# Altium PCB final_PCB.PcbDoc
Units mm, origin at the board's own origin, x right, y up, seen from the top; angles counter-clockwise.
Board outline 61.21 x 83.69 mm, 2 copper layers (Top Layer, Bottom Layer); 32 components, 26 nets, 116 pads, 31 vias.
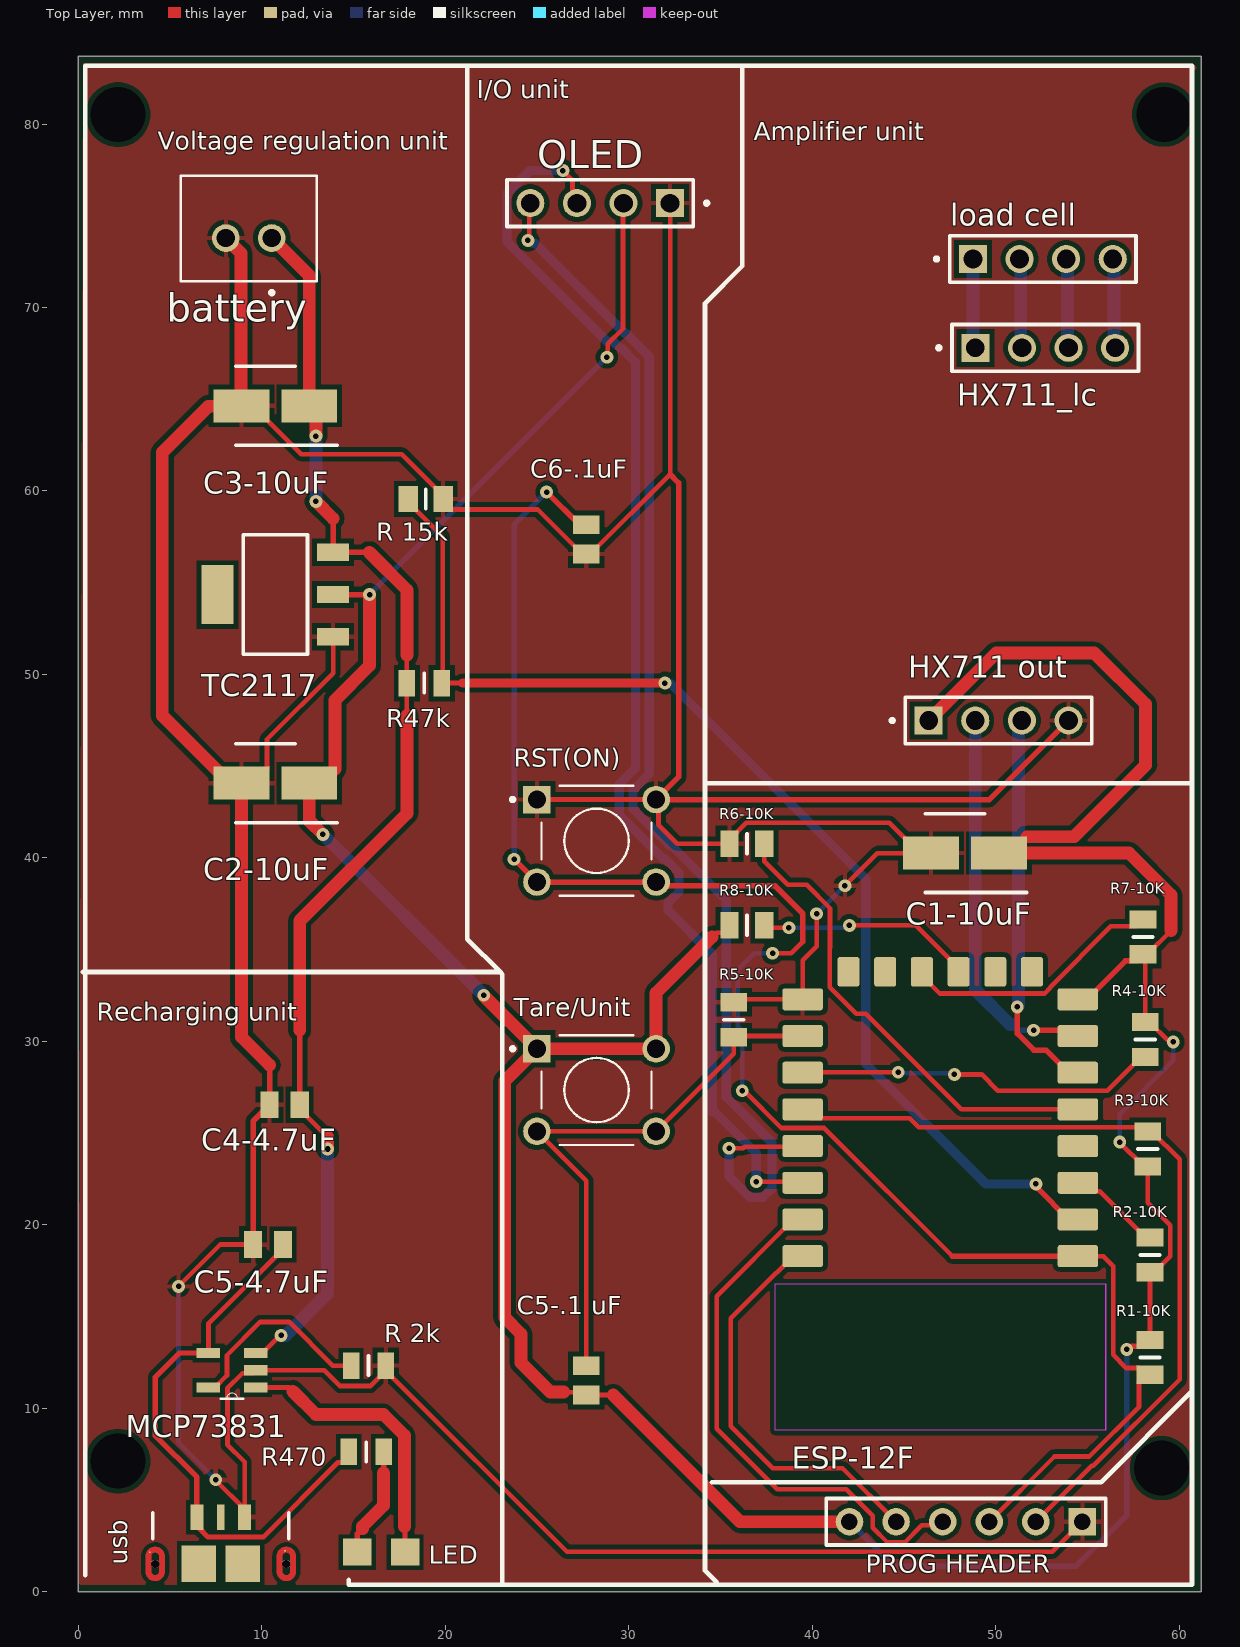
[diagram p0: Top Layer view]
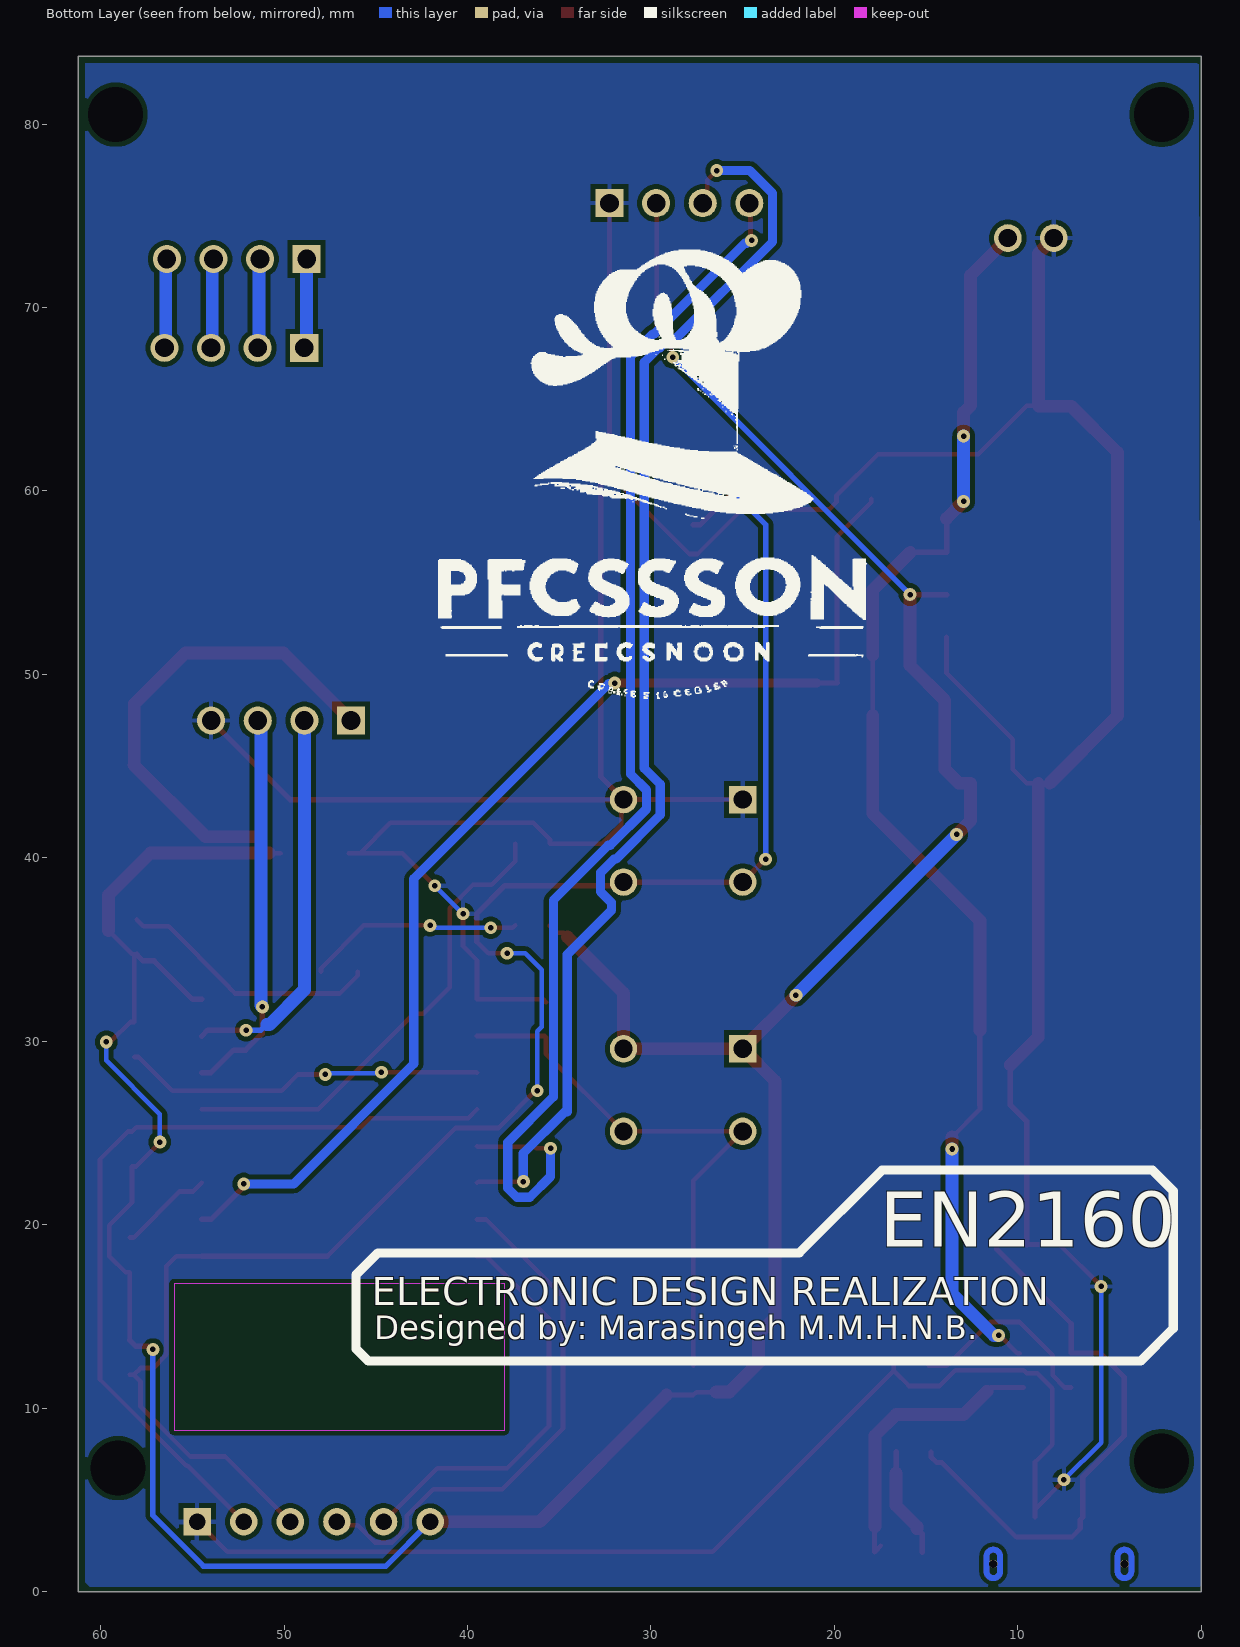
[diagram p1: Bottom Layer view, seen from below]
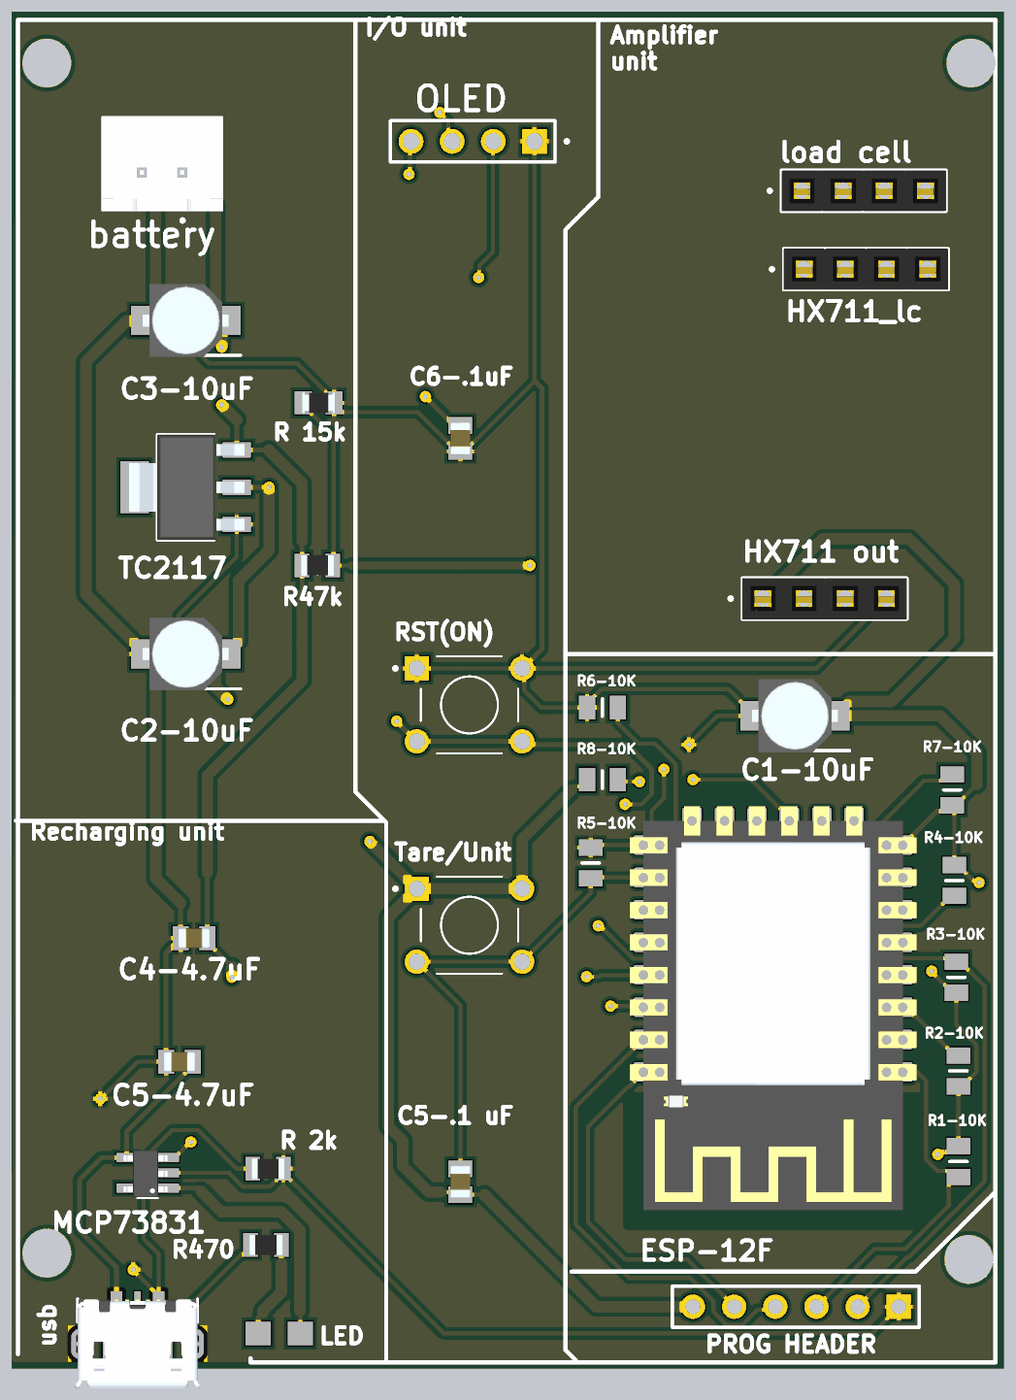
[diagram p2: 3D render of the assembled board from above, using the file's embedded part models]

## Layer stack, top to bottom
Top Solder: solder mask 0.0102, Solder Resist, Dk 3.5
Top Layer: signal copper 0.0356
Dielectric 1: dielectric 0.32, FR-4, Dk 4.8
Bottom Layer: signal copper 0.0356
Bottom Solder: solder mask 0.0102, Solder Resist, Dk 3.5

## Board outline
0,0 61.214,0 61.214,83.693 0,83.693

## Design rules (kind name [scope] priority, off if disabled: settings)
Clearance [All] p1: gap=0.254 ignorepadtopadclearanceinfootprint=TRUE except(0: Arc-Hole Track-Hole SMDPad-Hole THPad-Hole Via-Hole Fill-Hole Poly-Hole Region-Hole Text-Hole)
HoleSize [All] p1: absolutevalues=TRUE maxlimit=3 minlimit=0.025 maxpercent=80.000 minpercent=20.000
MinimumSolderMaskSliver [All] p1: minsoldermaskwidth=0.1
PolygonConnect [All] p1: connectstyle=Relief reliefconductorwidth=0.254 reliefentries=4 polygonreliefangle="90 Angle" airgapwidth=0.254
RoutingVias [All] p1: holewidth=0.3 width=0.7 viastyle="Through Hole" minholewidth=0.3 minwidth=0.7 maxholewidth=0.3 maxwidth=0.7
SMDNeckDown [All] p1: percent=50.000
SolderMaskExpansion [All] p1: expansion=0.102 istentingtop=FALSE
Width [All] p1: maxlimit=0.7 minlimit=0.254 preferedwidth=0.3
28 further rules are at their usual default settings.

## Components (designator, comment, footprint, x,y, rotation, side; value= is the part's Value field where it differs from the comment)
battery "B2B-XH-A(LF)(SN)" JST_B2B-XH-A(LF)(SN) 9.291,73.787 r0 top
C1-10uF "865080340001" CAPAE430X550N 48.332,40.259 r180 top
C2-10uF "865080340001" CAPAE430X550N 10.737,44.069 r180 top
C3-10uF "865080340001" CAPAE430X550N 10.737,64.643 r180 top
C4-4.7uF "885012107013" CAPC2012X145N 11.245,26.543 r0 top
C5-4.7uF "885012107013" CAPC2012X145N 10.345,18.923 r180 top
"C5-.1 uF" "C0805C104K5RAC7411" CAPC2012X88N 27.686,11.519 r90 top
C6-.1uF "C0805C104K5RAC7411" CAPC2012X88N 27.686,57.366 r90 top
ESP-12F "ESP-12F" ESP-12F 46.983,22.788 r180 top
"HX711 out" "MTSW-104-XX-X-S-XXX" SAMTEC_MTSW-104-XX-X-S-XXX 50.164,47.487 r0 top
HX711_lc "MTSW-104-XX-X-S-XXX" SAMTEC_MTSW-104-XX-X-S-XXX 52.709,67.804 r0 top
LED "CLM3C-AKW-CUAVB253" LEDM3020X140N 16.51,2.159 r180 top
"load cell" "MTSW-104-XX-X-S-XXX" SAMTEC_MTSW-104-XX-X-S-XXX 52.578,72.644 r0 top
MCP73831 "MCP73831T-2ACI/OT" SOT95P280X145-5N 8.382,12.065 r180 top
OLED "MTSW-104-XX-X-S-XXX" SAMTEC_MTSW-104-XX-X-S-XXX 28.448,75.692 r180 top
"PROG HEADER" "Header 6" HDR1X6 54.737,3.81 r180 top
R1-10K "CRGCQ0805J10K" RESC2013X65N 58.42,12.766 r270 top
R2-10K "CRGCQ0805J10K" RESC2013X65N 58.42,18.354 r90 top
R3-10K "CRGCQ0805J10K" RESC2013X65N 58.293,24.13 r270 top
R4-10K "CRGCQ0805J10K" RESC2013X65N 58.166,30.099 r270 top
R5-10K "CRGCQ0805J10K" RESC2013X65N 35.724,31.181 r90 top
R6-10K "CRGCQ0805J10K" RESC2013X65N 36.449,40.767 r180 top
R7-10K "CRGCQ0805J10K" RESC2013X65N 58.039,35.687 r270 top
R8-10K "CRGCQ0805J10K" RESC2013X65N 36.449,36.322 r180 top
R47k "CR0805-JW-473ELF" RESC2012X60N 18.862,49.53 r180 top
R470 "CRCW0805470RFKEAC" RESC2012X60N 15.687,7.62 r0 top
"R 2k" "CR0805-JW-202ELF" RESC2012X60N 15.814,12.319 r180 top
"R 15k" "ERJ-6GEYJ153V" RESC2012X70N 18.937,59.563 r180 top
RST(ON) "1825910-2" TE_1825910-2 24.996,43.18 r0 top
Tare/Unit "1825910-2" TE_1825910-2 24.996,29.591 r0 top
TC2117 "TC2117-3.3VDBTR" SOT230P700X180-4N 10.737,54.356 r180 top
usb "USB3090-XX-X_REVE" GCT_USB3090-XX-X_REVE 7.762,1.514 r0 top

## Footprints (in the part's own frame and the unit in brackets; to place one, negate y for a bottom-side part, rotate by r counter-clockwise, add the part's x,y. Pads: shape width x height; smd on the part's side, far side on the other; paste and mask are expansions set on the pad)
CAPAE430X550N [mm]
  rect 3.05x1.8 smd: 1(-1.85,0) 2(1.85,0)
  silkscreen extent -3.38,-2.15 2.15,2.15, body extent -10,-3.38 10,3.38, height 5.8
CAPC2012X88N [mm]
  rect 1.02x1.47 smd: 1(-0.8,0) 2(0.8,0)
  body extent -10,-3.38 10,3.38, height 5.8
CAPC2012X145N [mm]
  rect 0.99x1.47 smd: 1(-0.82,0) 2(0.82,0)
  body extent -10,-3.38 10,3.38, height 5.8
ESP-12F [mm]
  rrect20% 2.2x1.2 smd: 1(-7.5,4.5) 2(-7.5,2.5) 3(-7.5,0.5) 4(-7.5,-1.5) 5(-7.5,-3.5) 6(-7.5,-5.5) 7(-7.5,-7.5) 8(-7.5,-9.5) 9(7.5,-9.5) 10(7.5,-7.5) 11(7.5,-5.5) 12(7.5,-3.5) 13(7.5,-1.5) 14(7.5,0.5) 15(7.5,2.5) 16(7.5,4.5)
  rrect20% 1.2x1.6 smd: 17(-5,-11) 18(-3,-11) 19(-1,-11) 20(1,-11) 21(3,-11) 22(5,-11)
  Keep-Out Layer region: 9,6.011 -9.016,6.011 -9.016,14 9,14
  Keep-Out Layer region: 9,6.005 -9.007,6.005 -9.007,14 9,14
  body extent -8.85,-11.88 8.85,13.02, height 3.1
GCT_USB3090-XX-X_REVE [mm]
  rect 0.7x1.4 smd paste+0 mask+0.254: 1(-1.3,2.55) 5(1.3,2.55)
  rect 0.4x1.4 smd: 3(0,2.55)
  rect 0.1x0.1 smd paste-1 mask+0: 6(-3.87,0.63) 7(3.51,0.72)
  rect 1.9x2 smd: 8(-1.2,0) 9(1.2,0)
  round 0.45 hole 0.45 unplated: ""(-3.575,0) ""(3.575,0)
  Top Layer region: -3.548,0.924 -3.52,0.922 -3.493,0.919 -3.466,0.914 -3.439,0.907 -3.413,0.899 -3.387,0.89 -3.361,0.88 -3.337,0.868 -3.313,0.855 -3.289,0.84 -3.266,0.825 -3.245,0.808 -3.224,0.79 -3.204,0.771 -3.185,0.751 -3.167,0.73 -3.15,0.709 -3.135,0.686 -3.12,0.662 -3.107,0.638 -3.095,0.614 -3.085,0.588 -3.076,0.562 -3.068,0.536 -3.061,0.509 -3.056,0.482 -3.053,0.455 -3.051,0.427 -3.05,0.4 -3.05,0 -3.35,0 -3.35,0.4 -3.35,0.412 -3.351,0.424 -3.353,0.435 -3.355,0.447 -3.358,0.458 -3.361,0.47 -3.365,0.481 -3.369,0.492 -3.375,0.502 -3.38,0.512 -3.386,0.523 -3.393,0.532 -3.4,0.542 -3.408,0.551 -3.416,0.559 -3.424,0.567 -3.433,0.575 -3.443,0.582 -3.452,0.589 -3.463,0.595 -3.473,0.6 -3.483,0.606 -3.494,0.61 -3.505,0.614 -3.517,0.617 -3.528,0.62 -3.54,0.622 -3.551,0.624 -3.563,0.625 -3.587,0.625 -3.599,0.624 -3.61,0.622 -3.622,0.62 -3.633,0.617 -3.645,0.614 -3.656,0.61 -3.667,0.606 -3.677,0.6 -3.688,0.595 -3.698,0.589 -3.707,0.582 -3.717,0.575 -3.726,0.567 -3.734,0.559 -3.742,0.551 -3.75,0.542 -3.757,0.532 -3.764,0.523 -3.77,0.513 -3.775,0.502 -3.781,0.492 -3.785,0.481 -3.789,0.47 -3.792,0.458 -3.795,0.447 -3.797,0.435 -3.799,0.424 -3.8,0.412 -3.8,0.4 -3.8,0 -4.1,0 -4.1,0.4 -4.099,0.427 -4.097,0.455 -4.094,0.482 -4.089,0.509 -4.082,0.536 -4.074,0.562 -4.065,0.588 -4.055,0.614 -4.043,0.638 -4.03,0.663 -4.015,0.686 -4,0.709 -3.983,0.73 -3.965,0.751 -3.946,0.771 -3.926,0.79 -3.905,0.808 -3.884,0.825 -3.861,0.84 -3.837,0.855 -3.813,0.868 -3.789,0.88 -3.763,0.89 -3.737,0.899 -3.711,0.907 -3.684,0.914 -3.657,0.919 -3.63,0.922 -3.602,0.924 -3.575,0.925
  Top Layer region: -3.05,-0.4 -3.051,-0.427 -3.053,-0.455 -3.056,-0.482 -3.061,-0.509 -3.068,-0.536 -3.076,-0.562 -3.085,-0.588 -3.095,-0.614 -3.107,-0.638 -3.12,-0.662 -3.135,-0.686 -3.15,-0.709 -3.167,-0.73 -3.185,-0.751 -3.204,-0.771 -3.224,-0.79 -3.245,-0.808 -3.266,-0.825 -3.289,-0.84 -3.313,-0.855 -3.337,-0.868 -3.361,-0.88 -3.387,-0.89 -3.413,-0.899 -3.439,-0.907 -3.466,-0.914 -3.493,-0.919 -3.52,-0.922 -3.548,-0.924 -3.575,-0.925 -3.602,-0.924 -3.63,-0.922 -3.657,-0.919 -3.684,-0.914 -3.711,-0.907 -3.737,-0.899 -3.763,-0.89 -3.789,-0.88 -3.813,-0.868 -3.837,-0.855 -3.861,-0.84 -3.884,-0.825 -3.905,-0.808 -3.926,-0.79 -3.946,-0.771 -3.965,-0.751 -3.983,-0.73 -4,-0.709 -4.015,-0.686 -4.03,-0.663 -4.043,-0.638 -4.055,-0.614 -4.065,-0.588 -4.074,-0.562 -4.082,-0.536 -4.089,-0.509 -4.094,-0.482 -4.097,-0.455 -4.099,-0.427 -4.1,-0.4 -4.1,0 -3.8,0 -3.8,-0.4 -3.8,-0.412 -3.799,-0.424 -3.797,-0.435 -3.795,-0.447 -3.792,-0.458 -3.789,-0.47 -3.785,-0.481 -3.781,-0.492 -3.775,-0.502 -3.77,-0.513 -3.764,-0.523 -3.757,-0.532 -3.75,-0.542 -3.742,-0.551 -3.734,-0.559 -3.726,-0.567 -3.717,-0.575 -3.707,-0.582 -3.698,-0.589 -3.688,-0.595 -3.677,-0.6 -3.667,-0.606 -3.656,-0.61 -3.645,-0.614 -3.633,-0.617 -3.622,-0.62 -3.61,-0.622 -3.599,-0.624 -3.587,-0.625 -3.563,-0.625 -3.551,-0.624 -3.54,-0.622 -3.528,-0.62 -3.517,-0.617 -3.505,-0.614 -3.494,-0.61 -3.483,-0.606 -3.473,-0.6 -3.463,-0.595 -3.452,-0.589 -3.443,-0.582 -3.433,-0.575 -3.424,-0.567 -3.416,-0.559 -3.408,-0.551 -3.4,-0.542 -3.393,-0.532 -3.386,-0.523 -3.38,-0.512 -3.375,-0.502 -3.369,-0.492 -3.365,-0.481 -3.361,-0.47 -3.358,-0.458 -3.355,-0.447 -3.353,-0.435 -3.351,-0.424 -3.35,-0.412 -3.35,-0.4 -3.35,0 -3.05,0
  Top Layer region: 3.602,0.924 3.63,0.922 3.657,0.919 3.684,0.914 3.711,0.907 3.737,0.899 3.763,0.89 3.789,0.88 3.813,0.868 3.837,0.855 3.861,0.84 3.884,0.825 3.905,0.808 3.926,0.79 3.946,0.771 3.965,0.751 3.983,0.73 4,0.709 4.015,0.686 4.03,0.663 4.043,0.638 4.055,0.614 4.065,0.588 4.074,0.562 4.082,0.536 4.089,0.509 4.094,0.482 4.097,0.455 4.099,0.427 4.1,0.4 4.1,0 3.8,0 3.8,0.4 3.8,0.412 3.799,0.424 3.797,0.435 3.795,0.447 3.792,0.458 3.789,0.47 3.785,0.481 3.781,0.492 3.775,0.502 3.77,0.513 3.764,0.523 3.757,0.532 3.75,0.542 3.742,0.551 3.734,0.559 3.726,0.567 3.717,0.575 3.707,0.582 3.698,0.589 3.688,0.595 3.677,0.6 3.667,0.606 3.656,0.61 3.645,0.614 3.633,0.617 3.622,0.62 3.61,0.622 3.599,0.624 3.587,0.625 3.563,0.625 3.551,0.624 3.54,0.622 3.528,0.62 3.517,0.617 3.505,0.614 3.494,0.61 3.483,0.606 3.473,0.6 3.463,0.595 3.452,0.589 3.443,0.582 3.433,0.575 3.424,0.567 3.416,0.559 3.408,0.551 3.4,0.542 3.393,0.532 3.386,0.523 3.38,0.512 3.375,0.502 3.369,0.492 3.365,0.481 3.361,0.47 3.358,0.458 3.355,0.447 3.353,0.435 3.351,0.424 3.35,0.412 3.35,0.4 3.35,0 3.05,0 3.05,0.4 3.051,0.427 3.053,0.455 3.056,0.482 3.061,0.509 3.068,0.536 3.076,0.562 3.085,0.588 3.095,0.614 3.107,0.638 3.12,0.662 3.135,0.686 3.15,0.709 3.167,0.73 3.185,0.751 3.204,0.771 3.224,0.79 3.245,0.808 3.266,0.825 3.289,0.84 3.313,0.855 3.337,0.868 3.361,0.88 3.387,0.89 3.413,0.899 3.439,0.907 3.466,0.914 3.493,0.919 3.52,0.922 3.548,0.924 3.575,0.925
  Top Layer region: 4.1,-0.4 4.099,-0.427 4.097,-0.455 4.094,-0.482 4.089,-0.509 4.082,-0.536 4.074,-0.562 4.065,-0.588 4.055,-0.614 4.043,-0.638 4.03,-0.663 4.015,-0.686 4,-0.709 3.983,-0.73 3.965,-0.751 3.946,-0.771 3.926,-0.79 3.905,-0.808 3.884,-0.825 3.861,-0.84 3.837,-0.855 3.813,-0.868 3.789,-0.88 3.763,-0.89 3.737,-0.899 3.711,-0.907 3.684,-0.914 3.657,-0.919 3.63,-0.922 3.602,-0.924 3.575,-0.925 3.548,-0.924 3.52,-0.922 3.493,-0.919 3.466,-0.914 3.439,-0.907 3.413,-0.899 3.387,-0.89 3.361,-0.88 3.337,-0.868 3.313,-0.855 3.289,-0.84 3.266,-0.825 3.245,-0.808 3.224,-0.79 3.204,-0.771 3.185,-0.751 3.167,-0.73 3.15,-0.709 3.135,-0.686 3.12,-0.662 3.107,-0.638 3.095,-0.614 3.085,-0.588 3.076,-0.562 3.068,-0.536 3.061,-0.509 3.056,-0.482 3.053,-0.455 3.051,-0.427 3.05,-0.4 3.05,0 3.35,0 3.35,-0.4 3.35,-0.412 3.351,-0.424 3.353,-0.435 3.355,-0.447 3.358,-0.458 3.361,-0.47 3.365,-0.481 3.369,-0.492 3.375,-0.502 3.38,-0.512 3.386,-0.523 3.393,-0.532 3.4,-0.542 3.408,-0.551 3.416,-0.559 3.424,-0.567 3.433,-0.575 3.443,-0.582 3.452,-0.589 3.463,-0.595 3.473,-0.6 3.483,-0.606 3.494,-0.61 3.505,-0.614 3.517,-0.617 3.528,-0.62 3.54,-0.622 3.551,-0.624 3.563,-0.625 3.587,-0.625 3.599,-0.624 3.61,-0.622 3.622,-0.62 3.633,-0.617 3.645,-0.614 3.656,-0.61 3.667,-0.606 3.677,-0.6 3.688,-0.595 3.698,-0.589 3.707,-0.582 3.717,-0.575 3.726,-0.567 3.734,-0.559 3.742,-0.551 3.75,-0.542 3.757,-0.532 3.764,-0.523 3.77,-0.513 3.775,-0.502 3.781,-0.492 3.785,-0.481 3.789,-0.47 3.792,-0.458 3.795,-0.447 3.797,-0.435 3.799,-0.424 3.8,-0.412 3.8,-0.4 3.8,0 4.1,0
  Bottom Layer region: -3.548,0.924 -3.52,0.922 -3.493,0.919 -3.466,0.914 -3.439,0.907 -3.413,0.899 -3.387,0.89 -3.361,0.88 -3.337,0.868 -3.313,0.855 -3.289,0.84 -3.266,0.825 -3.245,0.808 -3.224,0.79 -3.204,0.771 -3.185,0.751 -3.167,0.73 -3.15,0.709 -3.135,0.686 -3.12,0.662 -3.107,0.638 -3.095,0.614 -3.085,0.588 -3.076,0.562 -3.068,0.536 -3.061,0.509 -3.056,0.482 -3.053,0.455 -3.051,0.427 -3.05,0.4 -3.05,0 -3.35,0 -3.35,0.4 -3.35,0.412 -3.351,0.424 -3.353,0.435 -3.355,0.447 -3.358,0.458 -3.361,0.47 -3.365,0.481 -3.369,0.492 -3.375,0.502 -3.38,0.512 -3.386,0.523 -3.393,0.532 -3.4,0.542 -3.408,0.551 -3.416,0.559 -3.424,0.567 -3.433,0.575 -3.443,0.582 -3.452,0.589 -3.463,0.595 -3.473,0.6 -3.483,0.606 -3.494,0.61 -3.505,0.614 -3.517,0.617 -3.528,0.62 -3.54,0.622 -3.551,0.624 -3.563,0.625 -3.587,0.625 -3.599,0.624 -3.61,0.622 -3.622,0.62 -3.633,0.617 -3.645,0.614 -3.656,0.61 -3.667,0.606 -3.677,0.6 -3.688,0.595 -3.698,0.589 -3.707,0.582 -3.717,0.575 -3.726,0.567 -3.734,0.559 -3.742,0.551 -3.75,0.542 -3.757,0.532 -3.764,0.523 -3.77,0.513 -3.775,0.502 -3.781,0.492 -3.785,0.481 -3.789,0.47 -3.792,0.458 -3.795,0.447 -3.797,0.435 -3.799,0.424 -3.8,0.412 -3.8,0.4 -3.8,0 -4.1,0 -4.1,0.4 -4.099,0.427 -4.097,0.455 -4.094,0.482 -4.089,0.509 -4.082,0.536 -4.074,0.562 -4.065,0.588 -4.055,0.614 -4.043,0.638 -4.03,0.663 -4.015,0.686 -4,0.709 -3.983,0.73 -3.965,0.751 -3.946,0.771 -3.926,0.79 -3.905,0.808 -3.884,0.825 -3.861,0.84 -3.837,0.855 -3.813,0.868 -3.789,0.88 -3.763,0.89 -3.737,0.899 -3.711,0.907 -3.684,0.914 -3.657,0.919 -3.63,0.922 -3.602,0.924 -3.575,0.925
  Bottom Layer region: -3.05,-0.4 -3.051,-0.427 -3.053,-0.455 -3.056,-0.482 -3.061,-0.509 -3.068,-0.536 -3.076,-0.562 -3.085,-0.588 -3.095,-0.614 -3.107,-0.638 -3.12,-0.662 -3.135,-0.686 -3.15,-0.709 -3.167,-0.73 -3.185,-0.751 -3.204,-0.771 -3.224,-0.79 -3.245,-0.808 -3.266,-0.825 -3.289,-0.84 -3.313,-0.855 -3.337,-0.868 -3.361,-0.88 -3.387,-0.89 -3.413,-0.899 -3.439,-0.907 -3.466,-0.914 -3.493,-0.919 -3.52,-0.922 -3.548,-0.924 -3.575,-0.925 -3.602,-0.924 -3.63,-0.922 -3.657,-0.919 -3.684,-0.914 -3.711,-0.907 -3.737,-0.899 -3.763,-0.89 -3.789,-0.88 -3.813,-0.868 -3.837,-0.855 -3.861,-0.84 -3.884,-0.825 -3.905,-0.808 -3.926,-0.79 -3.946,-0.771 -3.965,-0.751 -3.983,-0.73 -4,-0.709 -4.015,-0.686 -4.03,-0.663 -4.043,-0.638 -4.055,-0.614 -4.065,-0.588 -4.074,-0.562 -4.082,-0.536 -4.089,-0.509 -4.094,-0.482 -4.097,-0.455 -4.099,-0.427 -4.1,-0.4 -4.1,0 -3.8,0 -3.8,-0.4 -3.8,-0.412 -3.799,-0.424 -3.797,-0.435 -3.795,-0.447 -3.792,-0.458 -3.789,-0.47 -3.785,-0.481 -3.781,-0.492 -3.775,-0.502 -3.77,-0.513 -3.764,-0.523 -3.757,-0.532 -3.75,-0.542 -3.742,-0.551 -3.734,-0.559 -3.726,-0.567 -3.717,-0.575 -3.707,-0.582 -3.698,-0.589 -3.688,-0.595 -3.677,-0.6 -3.667,-0.606 -3.656,-0.61 -3.645,-0.614 -3.633,-0.617 -3.622,-0.62 -3.61,-0.622 -3.599,-0.624 -3.587,-0.625 -3.563,-0.625 -3.551,-0.624 -3.54,-0.622 -3.528,-0.62 -3.517,-0.617 -3.505,-0.614 -3.494,-0.61 -3.483,-0.606 -3.473,-0.6 -3.463,-0.595 -3.452,-0.589 -3.443,-0.582 -3.433,-0.575 -3.424,-0.567 -3.416,-0.559 -3.408,-0.551 -3.4,-0.542 -3.393,-0.532 -3.386,-0.523 -3.38,-0.512 -3.375,-0.502 -3.369,-0.492 -3.365,-0.481 -3.361,-0.47 -3.358,-0.458 -3.355,-0.447 -3.353,-0.435 -3.351,-0.424 -3.35,-0.412 -3.35,-0.4 -3.35,0 -3.05,0
  Bottom Layer region: 3.602,0.924 3.63,0.922 3.657,0.919 3.684,0.914 3.711,0.907 3.737,0.899 3.763,0.89 3.789,0.88 3.813,0.868 3.837,0.855 3.861,0.84 3.884,0.825 3.905,0.808 3.926,0.79 3.946,0.771 3.965,0.751 3.983,0.73 4,0.709 4.015,0.686 4.03,0.663 4.043,0.638 4.055,0.614 4.065,0.588 4.074,0.562 4.082,0.536 4.089,0.509 4.094,0.482 4.097,0.455 4.099,0.427 4.1,0.4 4.1,0 3.8,0 3.8,0.4 3.8,0.412 3.799,0.424 3.797,0.435 3.795,0.447 3.792,0.458 3.789,0.47 3.785,0.481 3.781,0.492 3.775,0.502 3.77,0.513 3.764,0.523 3.757,0.532 3.75,0.542 3.742,0.551 3.734,0.559 3.726,0.567 3.717,0.575 3.707,0.582 3.698,0.589 3.688,0.595 3.677,0.6 3.667,0.606 3.656,0.61 3.645,0.614 3.633,0.617 3.622,0.62 3.61,0.622 3.599,0.624 3.587,0.625 3.563,0.625 3.551,0.624 3.54,0.622 3.528,0.62 3.517,0.617 3.505,0.614 3.494,0.61 3.483,0.606 3.473,0.6 3.463,0.595 3.452,0.589 3.443,0.582 3.433,0.575 3.424,0.567 3.416,0.559 3.408,0.551 3.4,0.542 3.393,0.532 3.386,0.523 3.38,0.512 3.375,0.502 3.369,0.492 3.365,0.481 3.361,0.47 3.358,0.458 3.355,0.447 3.353,0.435 3.351,0.424 3.35,0.412 3.35,0.4 3.35,0 3.05,0 3.05,0.4 3.051,0.427 3.053,0.455 3.056,0.482 3.061,0.509 3.068,0.536 3.076,0.562 3.085,0.588 3.095,0.614 3.107,0.638 3.12,0.662 3.135,0.686 3.15,0.709 3.167,0.73 3.185,0.751 3.204,0.771 3.224,0.79 3.245,0.808 3.266,0.825 3.289,0.84 3.313,0.855 3.337,0.868 3.361,0.88 3.387,0.89 3.413,0.899 3.439,0.907 3.466,0.914 3.493,0.919 3.52,0.922 3.548,0.924 3.575,0.925
  Bottom Layer region: 4.1,-0.4 4.099,-0.427 4.097,-0.455 4.094,-0.482 4.089,-0.509 4.082,-0.536 4.074,-0.562 4.065,-0.588 4.055,-0.614 4.043,-0.638 4.03,-0.663 4.015,-0.686 4,-0.709 3.983,-0.73 3.965,-0.751 3.946,-0.771 3.926,-0.79 3.905,-0.808 3.884,-0.825 3.861,-0.84 3.837,-0.855 3.813,-0.868 3.789,-0.88 3.763,-0.89 3.737,-0.899 3.711,-0.907 3.684,-0.914 3.657,-0.919 3.63,-0.922 3.602,-0.924 3.575,-0.925 3.548,-0.924 3.52,-0.922 3.493,-0.919 3.466,-0.914 3.439,-0.907 3.413,-0.899 3.387,-0.89 3.361,-0.88 3.337,-0.868 3.313,-0.855 3.289,-0.84 3.266,-0.825 3.245,-0.808 3.224,-0.79 3.204,-0.771 3.185,-0.751 3.167,-0.73 3.15,-0.709 3.135,-0.686 3.12,-0.662 3.107,-0.638 3.095,-0.614 3.085,-0.588 3.076,-0.562 3.068,-0.536 3.061,-0.509 3.056,-0.482 3.053,-0.455 3.051,-0.427 3.05,-0.4 3.05,0 3.35,0 3.35,-0.4 3.35,-0.412 3.351,-0.424 3.353,-0.435 3.355,-0.447 3.358,-0.458 3.361,-0.47 3.365,-0.481 3.369,-0.492 3.375,-0.502 3.38,-0.512 3.386,-0.523 3.393,-0.532 3.4,-0.542 3.408,-0.551 3.416,-0.559 3.424,-0.567 3.433,-0.575 3.443,-0.582 3.452,-0.589 3.463,-0.595 3.473,-0.6 3.483,-0.606 3.494,-0.61 3.505,-0.614 3.517,-0.617 3.528,-0.62 3.54,-0.622 3.551,-0.624 3.563,-0.625 3.587,-0.625 3.599,-0.624 3.61,-0.622 3.622,-0.62 3.633,-0.617 3.645,-0.614 3.656,-0.61 3.667,-0.606 3.677,-0.6 3.688,-0.595 3.698,-0.589 3.707,-0.582 3.717,-0.575 3.726,-0.567 3.734,-0.559 3.742,-0.551 3.75,-0.542 3.757,-0.532 3.764,-0.523 3.77,-0.513 3.775,-0.502 3.781,-0.492 3.785,-0.481 3.789,-0.47 3.792,-0.458 3.795,-0.447 3.797,-0.435 3.799,-0.424 3.8,-0.412 3.8,-0.4 3.8,0 4.1,0
  silkscreen extent -3.7,1.37 3.7,2.77, body extent -3.9,-2.75 3.9,2.75, height 2.71
HDR1X6 [mm] "Connector; Header; 6 Position"
  rect 1.5x1.5 hole 0.9: 1(0,0)
  round 1.5 hole 0.9: 2(2.54,0) 3(5.08,0) 4(7.62,0) 5(10.16,0) 6(12.7,0)
  silkscreen extent -1.27,-1.27 13.97,1.27
JST_B2B-XH-A(LF)(SN) [mm]
  round 1.508 hole 1: 1(1.25,0) 2(-1.25,0)
  silkscreen extent -3.7,-3.07 3.7,3.4, body extent -3.72,-2.37 3.68,3.38, height 7
LEDM3020X140N [mm]
  rect 1.55x1.45 smd: 1(-1.3,0) 2(1.3,0)
  body extent -1.5,-0.49 1.5,0.51, height 2.01
RESC2012X60N [mm]
  rect 0.9x1.45 smd: 1(-0.95,0) 2(0.95,0)
  silkscreen extent 0,-0.53 0,0.53, body extent -1,-0.63 1,0.63, height 0.6
RESC2012X70N [mm]
  rect 1.05x1.4 smd: 1(-0.95,0) 2(0.95,0)
  silkscreen extent 0,-0.53 0,0.53, body extent -1,-0.63 1,0.63, height 0.6
RESC2013X65N [mm]
  rect 1x1.45 smd: 1(-0.95,0) 2(0.95,0)
  silkscreen extent 0,-0.54 0,0.54
SAMTEC_MTSW-104-XX-X-S-XXX [mm]
  rect 1.53x1.53 hole 1.02: 01(-3.81,0)
  round 1.53 hole 1.02: 02(-1.27,0) 03(1.27,0) 04(3.81,0)
  silkscreen extent -5.9,-1.27 5.08,1.27, body extent -5.08,-1.27 5.08,1.27, height 1.69
SOT95P280X145-5N [mil]
  rect 50x22 smd: 1(-51,37) 2(-51,0) 3(-51,-37) 4(51,-37) 5(51,37)
  silkscreen extent -24,49 24,61, body extent -48,-55 58,59, height 57
SOT230P700X180-4N [mm]
  rect 1.75x0.95 smd: 1(-3.15,2.3) 2(-3.15,0) 3(-3.15,-2.3)
  rect 1.75x3.2 smd: 4(3.15,0)
  silkscreen extent -1.75,-3.25 1.75,3.25, body extent -10,-3.38 10,3.38, height 5.8
TE_1825910-2 [mm]
  rect 1.498x1.498 / inner round 1.498 / far side rect 1.498x1.498 hole 0.99: 1(0,0)
  round 1.498 hole 0.99: 2(6.5,0) 3(0,-4.5) 4(6.5,-4.5)
  silkscreen extent -1.42,-5.24 6.24,0.74, body extent 0.19,-5.31 6.31,0.81

## Part data
battery: "Connector Header Through Hole 2 position 0.098 (2.50mm)", Package=None, Availability="In Stock", MF="JST Sales", MP=B2B-XH-A(LF)(SN), Price=None, Purchase-URL=https://pricing.snapeda.com/search/part/B2B-XH-A(LF)(SN)/?ref=eda
C1-10uF C2-10uF C3-10uF: "Wurth Elektronik 10uF 16 V dc Aluminium Electrolytic Capacitor, WCAP-ASLI Series 2000h 4 (Dia.) x 5.35mm", Manufacturer_Name="Wurth Elektronik", Mouser Part Number=710-865080340001, Datasheet Link=https://componentsearchengine.com/Datasheets/1/865080340001.pdf, Geometry.Height=5.5mm, Manufacturer_Part_Number=865080340001, Mouser Price/Stock=https://www.mouser.co.uk/ProductDetail/Wurth-Elektronik/865080340001?qs=0KOYDY2FL2%252BaqRFD837lAw%3D%3D
C4-4.7uF C5-4.7uF: "Multilayer Ceramic Capacitor 4.7uF 0805", Manufacturer_Name="Wurth Elektronik", Mouser Part Number=710-885012107013, Datasheet Link=https://katalog.we-online.de/pbs/datasheet/885012107013.pdf, Geometry.Height=1.45mm, Manufacturer_Part_Number=885012107013, Mouser Price/Stock=https://www.mouser.co.uk/ProductDetail/Wurth-Elektronik/885012107013?qs=0KOYDY2FL29a055VqgRqNw%3D%3D
"C5-.1 uF" C6-.1uF: "Cap Ceramic 0.1uF 50V X7R 10% Pad SMD 0805 125C T/R", Manufacturer_Name=KEMET, Mouser Part Number=80-C0805C104K5RACLR, Arrow Part Number=C0805C104K5RAC7411, Arrow Price/Stock=https://www.arrow.com/en/products/c0805c104k5rac7411/kemet-corporation, Datasheet Link=https://www.mouser.com/datasheet/2/212/KEM_C1002_X7R_SMD-1102033.pdf, Geometry.Height=0.88mm, Manufacturer_Part_Number=C0805C104K5RAC7411, Mouser Price/Stock=https://www.mouser.co.uk/ProductDetail/KEMET/C0805C104K5RAC7411?qs=jbRM9o5BbzPcVXF0wW9AYg%3D%3D
ESP-12F: "WiFi Module", Package=Package, Availability="Not in stock", Check_prices=https://www.snapeda.com/parts/ESP-12F/AI-Thinker/view-part/?ref=eda, MF=AI-Thinker, MP=ESP-12F, Price=None, SnapEDA_Link=https://www.snapeda.com/parts/ESP-12F/AI-Thinker/view-part/?ref=snap
"HX711 out" HX711_lc "load cell" OLED: Package=None, Availability="No availability data", Check_prices=https://www.snapeda.com/parts/MTSW-104-12-F-S-850/Samtec/view-part/6593359/?ref=eda, MF=Samtec, MP=MTSW-104-12-F-S-850, Price=None, SnapEDA_Link=https://www.snapeda.com/parts/MTSW-104-12-F-S-850/Samtec/view-part/6593359/?ref=snap
LED: "Standard LEDs - SMD Amber LED Cree PLCC2 1 in 1 SMD LED CLM3C-RKW/AKW", Manufacturer_Name=Wolfspeed, Mouser Part Number=941-CLM3CAKWCUAVB253, Datasheet Link=https://www.mouser.co.uk/datasheet/2/90/CLM3CRKWAKW1156-274590.pdf, Geometry.Height=1.4mm, Manufacturer_Part_Number=CLM3C-AKW-CUAVB253, Mouser Price/Stock=https://www.mouser.co.uk/ProductDetail/Cree-LED/CLM3C-AKW-CUAVB253?qs=3AcK5DacLbqERPW6%2FzkoPg%3D%3D
MCP73831: library part MCP73831T-5ACI/OT, "Charger IC Lithium Ion/Polymer SOT-23-5", Package="SOT-23-5 Microchip", Availability=Unavailable, MF=Microchip, MP=MCP73831T-5ACI/OT, Price=None, SnapEDA_Link=https://www.snapeda.com/parts/MCP73831T-5ACI/OT/Microchip/view-part/1037579/?ref=snap
"PROG HEADER": "Header, 6-Pin", LatestRevisionDate=17-Jul-2002, LatestRevisionNote="Re-released for DXP Platform.", Publisher="Altium Limited"
R1-10K R2-10K R3-10K R4-10K R5-10K R6-10K R7-10K R8-10K: "TE CONNECTIVITY - CRGCQ0805J10K - RES, 10K, 5%, 0805, THICK FILM", Manufacturer_Name="TE Connectivity", Mouser Part Number=279-CRGCQ0805J10K, Datasheet Link=https://www.te.com/commerce/DocumentDelivery/DDEController?Action=showdoc&DocId=Data+Sheet%7F1773204-3%7F1%7Fpdf%7FEnglish%7FENG_DS_1773204-3_1.pdf%7F2176341-1, Geometry.Height=0.65mm, Manufacturer_Part_Number=CRGCQ0805J10K, Mouser Price/Stock=https://www.mouser.co.uk/ProductDetail/TE-Connectivity-Holsworthy/CRGCQ0805J10K?qs=wUXugUrL1qw7JO9BgWPrfA%3D%3D
R47k: "Resistor", Manufacturer_Name=Bourns, Mouser Part Number=652-CR0805JW-473ELF, Arrow Part Number=CR0805-JW-473ELF, Arrow Price/Stock=https://www.arrow.com/en/products/cr0805-jw-473elf/bourns?region=nac, Datasheet Link=https://www.bourns.com/pdfs/chpreztr.pdf, Height=0.6mm, Manufacturer_Part_Number=CR0805-JW-473ELF, Mouser Price/Stock=https://www.mouser.co.uk/ProductDetail/Bourns/CR0805-JW-473ELF?qs=%252BcBkmVQIZ2S5L%2FTv0l5Nkg%3D%3D
R470: "Resistor", Manufacturer_Name=Vishay, Mouser Part Number=71-CRCW0805470RFKEAC, Arrow Part Number=CRCW0805470RFKEAC, Arrow Price/Stock=https://www.arrow.com/en/products/crcw0805470rfkeac/vishay?region=nac, Datasheet Link=https://mouser.componentsearchengine.com/Datasheets/1/CRCW0805470RFKEAC.pdf, Height=0.6mm, Manufacturer_Part_Number=CRCW0805470RFKEAC, Mouser Price/Stock=https://www.mouser.co.uk/ProductDetail/Vishay-Dale/CRCW0805470RFKEAC?qs=E3Y5ESvWgWPsF5leBpDSrQ%3D%3D
"R 2k": "Resistor", Manufacturer_Name=Bourns, Mouser Part Number=652-CR0805JW-202ELF, Arrow Part Number=CR0805-JW-202ELF, Arrow Price/Stock=https://www.arrow.com/en/products/cr0805-jw-202elf/bourns, Datasheet Link=https://www.bourns.com/pdfs/chpreztr.pdf, Height=0.6mm, Manufacturer_Part_Number=CR0805-JW-202ELF, Mouser Price/Stock=https://www.mouser.co.uk/ProductDetail/Bourns/CR0805-JW-202ELF?qs=wL7NMIHXUPnyGz%2Fa3t%2FGQg%3D%3D
"R 15k": "Resistor", Manufacturer_Name=Panasonic, Mouser Part Number=667-ERJ-6GEYJ153V, Datasheet Link=https://datasheet.datasheetarchive.com/originals/distributors/DKDS40/DSANUWW0010935.pdf, Height=0.7mm, Manufacturer_Part_Number=ERJ-6GEYJ153V, Mouser Price/Stock=https://www.mouser.co.uk/ProductDetail/Panasonic/ERJ-6GEYJ153V?qs=gybxhQrZOyE8NVeFJR%2FEkg%3D%3D
RST(ON) Tare/Unit: "50 mA SPST Round Actuator 160 Gram Force Tactile Pushbutton Switch", Package=None, Availability="In Stock", Check_prices=https://www.snapeda.com/parts/1825910-2/TE+Connectivity+ALCOSWITCH+Switches/view-part/?ref=eda, EU_RoHS_Compliance=Compliant, MF="TE Connectivity", MP=1825910-2, Price=None, Purchase-URL=https://pricing.snapeda.com/search/part/1825910-2/?ref=eda, SnapEDA_Link=https://www.snapeda.com/parts/1825910-2/TE+Connectivity+ALCOSWITCH+Switches/view-part/?ref=snap
TC2117: "Microchip TC2117-3.3VDBTR, LDO Voltage Regulator, 800mA, 3.3 V +/-0.5%, 2.7  6 Vin, 3-Pin SOT-223", Manufacturer_Name=Microchip, Mouser Part Number=579-TC2117-3.3VDBTR, Arrow Part Number=TC2117-3.3VDBTR, Arrow Price/Stock=https://www.arrow.com/en/products/tc2117-3.3vdbtr/microchip-technology?region=nac, Datasheet Link=https://componentsearchengine.com/Datasheets/2/TC2117-3.3VDBTR.pdf, Geometry.Height=1.8mm, Manufacturer_Part_Number=TC2117-3.3VDBTR, Mouser Price/Stock=https://www.mouser.co.uk/ProductDetail/Microchip-Technology/TC2117-3.3VDBTR?qs=AF%252BffTaPb30YsLOBvxArLw%3D%3D
usb: "Micro USB Receptacle, Type AB, SMT, R/A, Bottom Mount, w/out Peg, w/outer shell stakes", Package=None, Availability=Unavailable, MP=USB3090-XX-X_REVE, Price=None

## Free pads (board coordinates)
  round 1.524 hole 3: 2(59.055,6.731) 3(59.182,80.518) 4(2.159,80.518) 5(2.159,7.112)

## Via types
v1: diameter 0.7, hole 0.3, Top Layer to Bottom Layer, 31 vias

## Nets (pads, with @x,y where several pads share a name; then routed paths per layer and width w, separated by ;. In a path a pad name is that pad's centre, name@x,y a point inside that pad or via, vN(x,y) a via of type N, cw(c..) or ccw(c..) an arc to the next point about the centre after c; other vN are vias at no path point)
A+: "load cell.01" HX711_lc.01 | length 4.9
  Bottom Layer w0.254: HX711_lc.01@48.768,67.935 HX711_lc.01
  Bottom Layer w0.7: HX711_lc.01@48.768,67.935 48.768,72.644
A-: "load cell.02" HX711_lc.02 | length 4.9
  Bottom Layer w0.3: 51.308,72.644 51.374,72.578 ; HX711_lc.02@51.374,67.87 HX711_lc.02
  Bottom Layer w0.7: HX711_lc.02@51.374,67.87 51.374,72.578
BatLev: "R 15k.2" ESP-12F.2 R47k.1 | length 63.6
  Top Layer w0.254: 17.987,59.563 17.987,59.388 19.862,57.513 19.862,49.58 R47k.1 20.955,49.53
  Top Layer w0.3: v1(52.197,22.225) 52.274,22.148 52.274,21.997 53.983,20.288 ESP-12F.2
  Top Layer w0.5: 20.955,49.53 v1(31.974,49.53)
  Bottom Layer w0.5: v1(31.974,49.53) 32.012,49.492 32.296,49.492 42.926,38.862 42.926,28.779 49.48,22.225 v1(52.197,22.225)
DT: "HX711 out.03" ESP-12F.6 | length 21.4
  Top Layer w0.3: v1(51.181,31.876) 51.195,31.862 51.195,30.416 52.094,29.516 52.755,29.516 53.983,28.288 ESP-12F.6
  Bottom Layer w0.3: v1(51.181,31.876) v1@51.258,31.953 ; 51.258,47.311 51.434,47.487
  Bottom Layer w0.7: v1@51.258,31.953 51.258,47.311
E+: "load cell.04" HX711_lc.04 | length 4.9
  Bottom Layer w0.3: 56.388,72.644 56.454,72.578 ; HX711_lc.04@56.454,67.87 HX711_lc.04
  Bottom Layer w0.7: HX711_lc.04@56.454,67.87 56.454,72.578
E-: "load cell.03" HX711_lc.03 | length 4.9
  Bottom Layer w0.3: 53.848,72.644 53.914,72.578 ; HX711_lc.03@53.914,67.87 HX711_lc.03
  Bottom Layer w0.7: HX711_lc.03@53.914,67.87 53.914,72.578
FLASH: "PROG HEADER.2" ESP-12F.12 R3-10K.1 | length 44.7
  Top Layer w0.254: ESP-12F.12 39.956,25.815 40.594,25.815 40.605,25.804 45.316,25.804 45.813,25.307 58.066,25.307 R3-10K.1 58.518,25.08 60.034,23.564 60.034,11.566 55.326,6.858 55.245,6.858 52.197,3.81
GND: "HX711 out.04" "PROG HEADER.1" "R 2k.1" "R 15k.1" battery.2 C1-10uF.2 C2-10uF.2 C3-10uF.2 C4-4.7uF.1 C5-4.7uF.2 C6-.1uF.1 ESP-12F.9 MCP73831.2 OLED.01 R5-10K.2 R6-10K.2 RST(ON).1 RST(ON).2 TC2117.1 usb.5 | length 276.9
  Top Layer w0.254: v1(5.461,16.637) 7.747,18.923 C5-4.7uF.2 ; v1(7.493,6.096) 7.493,6.058 usb.5@9.062,4.489 ; C2-10uF.2 9.512,44.069 10.285,44.842 10.285,46.474 13.887,50.076 TC2117.1 ; C3-10uF.2 9.512,64.643 12.152,62.003 17.622,62.003 19.887,59.738 19.887,59.563 19.887,59.388 20.285,58.99 25.037,58.99 27.461,56.566 C6-.1uF.1 27.911,56.566 32.258,60.913 OLED.01 ; usb.5 usb.5@9.062,4.489 ; 16.764,12.319 16.764,12.044 ; 24.996,43.18 31.496,43.18 31.623,43.053 31.623,41.803 32.659,40.767 R6-10K.2 35.499,40.992 36.417,41.91 44.206,41.91 C1-10uF.2@45.857,40.259 ; R5-10K.2 35.881,32.288 ESP-12F.9 39.483,34.419 40.243,35.179 v1(40.243,36.957) ; v1(41.783,38.481) 43.561,40.259 C1-10uF.2@45.857,40.259 ; C1-10uF.2 C1-10uF.2@45.857,40.259 ; 54.737,3.81 53.098,2.171 26.637,2.171 16.764,12.044 ; usb.5@9.062,4.489 9.062,7.067 8.128,8.001 8.128,11.093 8.948,11.913 9.525,11.913 MCP73831.2 13.404,12.065 14.256,11.213 15.933,11.213 16.764,12.044
  Top Layer w0.3: C2-10uF.2@8.262,44.069 C2-10uF.2 ; C3-10uF.2@8.863,64.619 C3-10uF.2 ; C5-4.7uF.2 9.525,25.643 C4-4.7uF.1 10.425,28.691 10.414,28.702 ; 32.258,60.913 32.728,60.443 32.728,44.412 31.496,43.18 31.623,43.18 49.667,43.18 53.974,47.487
  Top Layer w0.7: battery.2 8.868,72.96 C3-10uF.2@8.868,64.662 ; C2-10uF.2@8.262,44.069 4.572,47.759 4.572,62.103 7.088,64.619 C3-10uF.2@8.863,64.619 ; C2-10uF.2 8.887,30.229 10.414,28.702
  Bottom Layer w0.254: v1(5.461,16.637) 5.461,8.128 v1(7.493,6.096) ; v1(40.243,36.957) 40.251,36.957 41.775,38.481 v1(41.783,38.481)
Netbattery_1: battery.1 C3-10uF.1 C4-4.7uF.2 MCP73831.3 R47k.2 TC2117.3 | length 69.8
  Top Layer w0.254: MCP73831.3@9.892,13.005 10.033,13.005 10.998,13.97 v1(11.049,13.97) ; C4-4.7uF.2 12.065,26.303 13.589,24.779 ; 17.907,47.752 R47k.2@17.907,49.525 ; 17.907,51.054 17.907,49.535 R47k.2
  Top Layer w0.3: C4-4.7uF.2 12.065,30.607 ; 13.887,58.503 TC2117.3 15.861,56.656
  Top Layer w0.7: battery.1 12.587,71.741 C3-10uF.1 12.954,64.276 v1(12.954,62.992) ; 12.065,30.607 12.065,36.576 17.912,42.423 17.912,47.747 17.907,47.752 ; v1(12.954,59.436) 13.887,58.503 ; v1(13.589,24.13) 13.589,24.779 ; 15.861,56.656 17.912,54.605 17.912,51.059 17.907,51.054
  Bottom Layer w0.7: v1(11.049,13.97) 11.303,13.97 13.589,16.256 v1(13.589,24.13) ; v1(12.954,59.436) v1(12.954,62.992)
NetC5-4.7uF_1: C5-4.7uF.1 MCP73831.4 R470.1 usb.1 | length 30.5
  Top Layer w0.274: 5.512,13.005 MCP73831.4
  Top Layer w0.279: usb.1@6.597,3.929 6.597,3.436 7.063,2.97 10.082,2.97 14.147,7.035 14.427,7.035 14.737,7.345 R470.1 ; MCP73831.4 7.087,14.605 11.165,18.683 C5-4.7uF.1
  Top Layer w0.3: 5.512,13.005 4.19,11.683 4.19,8.51 6.462,6.238 usb.1
NetESP-12F_3: ESP-12F.3 R2-10K.2 | length 5.2
  Top Layer w0.254: ESP-12F.3 54.956,21.815 55.684,21.815 58.195,19.304 R2-10K.2
NetESP-12F_5: ESP-12F.5 R6-10K.1 | length 26.2
  Top Layer w0.254: R6-10K.1 37.399,39.806 38.672,38.533 39.701,38.533 40.974,37.26 40.974,35.104 40.964,35.094 40.964,32.938 42.406,31.496 42.926,31.496 48.134,26.288 ESP-12F.5
NetESP-12F_11: ESP-12F.11 R4-10K.2 | length 19.9
  Top Layer w0.254: ESP-12F.11 39.507,28.312 v1(44.695,28.312) ; v1(47.752,28.194) 49.24,28.194 50.127,27.307 56.099,27.307 57.941,29.149 R4-10K.2
  Bottom Layer w0.254: v1(44.695,28.312) 44.75,28.258 47.688,28.258 v1(47.752,28.194)
NetESP-12F_19: ESP-12F.19 R8-10K.1 | length 11.9
  Top Layer w0.254: R8-10K.1 37.526,36.195 v1(38.735,36.195) ; v1(42.037,36.322) 45.649,36.322 47.983,33.988 ESP-12F.19
  Bottom Layer w0.254: v1(38.735,36.195) 41.789,36.195 41.916,36.322 v1(42.037,36.322)
NetESP-12F_20: ESP-12F.20 R7-10K.1 | length 14.4
  Top Layer w0.254: ESP-12F.20 45.983,33.588 46.964,32.607 52.671,32.607 52.983,32.919 52.983,32.957 56.29,36.264 57.666,36.264 R7-10K.1
NetLED_1: LED.1 MCP73831.1 | length 16
  Top Layer w0.254: MCP73831.1 11.481,11.125 ; LED.1@17.468,2.501 LED.1 17.81,3.526 17.78,3.556
  Top Layer w0.3: 11.481,11.125 11.684,10.922
  Top Layer w0.7: 11.684,10.922 12.954,9.652 16.634,9.652 17.78,8.506 17.78,3.556
NetLED_2: LED.2 R470.2 | length 6.1
  Top Layer w0.3: LED.2 15.21,3.145 15.494,3.429 ; 16.637,6.477 R470.2
  Top Layer w0.7: 15.494,3.429 15.494,3.556 16.637,4.699 16.637,6.477
NetMCP73831_5: "R 2k.2" MCP73831.5 | length 10.9
  Top Layer w0.254: MCP73831.5 7.442,11.125 8.103,11.786 8.103,12.883 9.92,14.701 11.487,14.701 13.869,12.319 14.864,12.319
RST: "PROG HEADER.3" C6-.1uF.2 ESP-12F.1 R1-10K.2 RST(ON).3 RST(ON).4 | length 97.2
  Top Layer w0.254: 31.496,38.68 31.695,38.481 ; v1(36.195,27.305) 36.297,27.305 38.329,25.273 40.667,25.273 47.652,18.288 ; v1(37.846,34.798) 38.862,34.798 39.489,35.425 ; 49.657,3.81 53.213,7.366 55.116,7.366 57.822,10.072 57.822,11.443 R1-10K.2@58.195,11.816 ; ESP-12F.1 55.88,18.288 56.419,17.749 56.419,12.905 57.135,12.189 57.822,12.189 R1-10K.2@58.195,11.816 ; R1-10K.2 R1-10K.2@58.195,11.816
  Top Layer w0.3: v1(23.749,39.927) 24.996,38.68 31.496,38.68 ; v1(25.527,59.944) 27.305,58.166 C6-.1uF.2 ; 31.695,38.481 37.973,38.481 39.489,36.965 39.489,35.425 ; 47.652,18.288 ESP-12F.1
  Bottom Layer w0.254: v1(36.195,27.305) 36.195,30.539 35.951,30.783 35.951,33.897 36.852,34.798 v1(37.846,34.798)
  Bottom Layer w0.3: v1(23.749,39.927) 23.749,58.166 v1(25.527,59.944)
RX: "PROG HEADER.4" ESP-12F.15 | length 29.4
  Top Layer w0.254: ESP-12F.15 38.983,20.288 34.798,16.103 34.798,8.89 38.1,5.588 41.858,5.588 43.307,4.139 43.307,3.481 44.109,2.679 45.045,2.679 45.986,3.62 46.927,3.62 47.117,3.81
SCK: "HX711 out.02" ESP-12F.7 | length 21.3
  Top Layer w0.3: v1@52.091,30.607 54.164,30.607 ESP-12F.7
  Bottom Layer w0.3: 50.945,30.922 51.26,30.607 v1(52.07,30.607)
  Bottom Layer w0.7: 48.894,47.487 48.894,33.173 48.894,32.814 50.786,30.922 50.945,30.922
SCL: ESP-12F.14 OLED.03 | length 69.3
  Top Layer w0.254: v1(26.416,77.47) 26.934,76.952 26.934,75.936 OLED.03 ; v1(36.957,22.352) 39.419,22.352 ESP-12F.14
  Bottom Layer w0.5: v1(26.416,77.47) 24.621,77.47 23.369,76.218 23.369,73.594 28.816,68.148 29.166,68.148 29.511,67.802 29.58,67.802 30.366,67.016 30.366,44.888 29.489,44.011 29.489,42.349 31.905,39.933 32.015,39.933 32.749,39.199 32.749,38.161 32.149,37.561 32.149,37.147 34.566,34.731 34.566,26.162 34.689,26.162 36.957,23.894 v1(36.957,22.352)
SDA: ESP-12F.13 OLED.04 | length 68.8
  Top Layer w0.254: v1(24.511,73.66) 24.575,73.724 24.575,75.629 OLED.04 ; v1(35.473,24.17) 36.244,24.17 36.331,24.257 39.452,24.257 ESP-12F.13
  Bottom Layer w0.5: v1(24.511,73.66) 24.632,73.66 24.79,73.502 24.878,73.502 29.824,68.556 29.892,68.556 31.12,67.329 31.12,44.576 30.243,43.699 30.243,42.661 32.217,40.687 32.327,40.687 35.32,37.695 35.32,26.972 37.811,24.481 37.811,21.998 37.311,21.498 36.603,21.498 35.473,22.628 v1(35.473,24.17)
Tare/Unit: "C5-.1 uF.2" ESP-12F.10 R5-10K.1 Tare/Unit.3 Tare/Unit.4 | length 31.1
  Top Layer w0.254: 27.686,12.319 27.686,22.401 Tare/Unit.3 Tare/Unit.4 35.724,29.319 R5-10K.1 35.781,30.288 ESP-12F.10
TX: "PROG HEADER.5" ESP-12F.16 | length 22.4
  Top Layer w0.254: ESP-12F.16 38.983,18.288 38.07,17.375 38.042,17.375 35.56,14.893 35.56,9.017 37.846,6.731 41.656,6.731 44.577,3.81
VCC: "C5-.1 uF.1" "HX711 out.01" "PROG HEADER.6" C1-10uF.1 C2-10uF.1 ESP-12F.8 OLED.02 R1-10K.1 R2-10K.1 R3-10K.2 R4-10K.1 R7-10K.2 R8-10K.2 Tare/Unit.1 Tare/Unit.2 TC2117.2 | length 214.4
  Top Layer w0.254: 26.459,10.879 27.526,10.879 27.686,10.719 29.159,10.719 ; v1(28.813,67.294) 28.863,67.344 28.863,68.025 29.689,68.851 29.689,75.663 OLED.02 ; 34.544,35.687 34.767,35.91 35.126,35.91 35.499,36.283 R8-10K.2 ; C1-10uF.1 50.807,40.259 C1-10uF.1@51.696,41.148 ; v1(56.769,24.511) 56.769,24.479 58.068,23.18 R3-10K.2 58.293,21.195 59.526,19.962 59.526,18.285 58.645,17.404 R2-10K.1 R1-10K.1 ; 58.166,45.085 58.188,45.063 ; 59.563,36.036 58.264,34.737 58.166,34.737 R7-10K.2 58.166,34.61 R4-10K.1 58.391,31.049 59.383,30.057 59.605,30.057 v1(59.69,29.972)
  Top Layer w0.3: TC2117.2 v1(15.875,54.356) ; ESP-12F.8 54.983,32.288 57.082,34.387 57.689,34.387 R7-10K.2 ; v1(57.15,13.208) 57.258,13.208 57.416,13.366 58.07,13.366 R1-10K.1
  Top Layer w0.7: v1(13.335,41.275) 12.587,42.023 C2-10uF.1 13.212,44.069 13.985,44.842 13.985,48.594 15.875,50.484 v1(15.875,54.356) ; v1(22.098,32.512) 22.098,32.489 Tare/Unit.1 ; 26.459,10.879 25.726,10.879 24.13,12.475 24.13,14.05 23.241,14.939 23.241,27.836 Tare/Unit.1 ; 29.159,10.719 36.068,3.81 42.037,3.81 ; 34.544,35.687 31.496,32.639 Tare/Unit.2 Tare/Unit.1 ; 46.354,47.487 50.038,51.171 55.382,51.171 58.166,48.387 58.166,45.085 ; C1-10uF.1@50.807,40.259 57.277,40.259 59.563,37.973 59.563,36.036 ; C1-10uF.1@51.696,41.148 54.273,41.148 58.188,45.063
  Bottom Layer w0.254: v1(56.769,24.511) 56.769,26.035 59.69,28.956 v1(59.69,29.972)
  Bottom Layer w0.3: v1(15.875,54.356) v1(28.813,67.294) ; 42.037,3.81 44.45,1.397 54.395,1.397 57.15,4.152 v1(57.15,13.208)
  Bottom Layer w0.7: v1(13.335,41.275) v1(22.098,32.512)
pads on no net: ESP-12F.4 ESP-12F.17 ESP-12F.18 ESP-12F.21 ESP-12F.22 TC2117.4 usb. usb.3 usb.6 usb.7 usb.8 usb.9

## Polygon pours and split planes (outlines as drawn)
GND on Bottom Layer "NONET_L-01_P-001" (solid, remove dead copper, pour order 0): 0.127,83.439 0.254,83.312 60.833,83.312 60.833,0.508 60.579,0.254 0,0.254
GND on Top Layer "NONET_L-01_P-001" (solid, remove dead copper, pour order 1): 0.254,83.312 60.706,83.312 60.96,83.058 60.706,82.804 60.706,0.381 0.037,0.381 0,0.344

## Silkscreen, mask and mechanical layers (free items; w line width, h text height)
Top Overlay:
  lines w0.254: 0.381,0.889 0.381,83.185 60.706,83.185 60.706,0.381 14.732,0.381 14.732,0.635 ; 21.209,83.185 21.209,35.56 22.987,33.782 ; 23.114,0.508 23.114,33.655 22.987,33.782 ; 34.29,44.069 60.706,44.069 ; 34.544,5.969 55.753,5.969 60.706,10.922 ; 34.798,0.508 34.163,1.143 34.163,70.231 36.195,72.263 36.195,83.185 ; 22.987,33.782 0.254,33.782 22.987,33.782
  text "I/O unit" at 21.717,81.407 h1
  text "Amplifier unit" at 36.83,79.121 h1
  text "Voltage regulation unit" at 4.318,78.613 h1
  text "Recharging unit" at 1.016,31.115 h1
Bottom Overlay:
  drawing of 95 lines, arcs and shapes, not listed
  text "EN2160" at 17.526,18.796 h3
  text "ELECTRONIC DESIGN REALIZATION" at 45.212,15.621 h1.52
  text "Designed by: Marasingeh M.M.H.N.B." at 45.085,13.768 h1.3
Mechanical 1:
  lines w0.254: 0,0.254 0,83.693 61.214,83.693 61.214,0.127 0.127,0.127 0,0.254

## Text inside footprints (layer, text, board x,y; h text height)
usb: Mechanical 13 "PCB Edge" at 5.857,-1.026 h0.67